# Altium PCB 2020-04-02-04-30101 - PCB1.PcbDoc
Units mm, origin at the board's own origin, x right, y up, seen from the top; angles counter-clockwise.
Board outline 95 x 50 mm, 2 copper layers (Top Layer, Bottom Layer); 4 components, 10 nets, 25 pads, 0 vias.
Unrouted connection lines stored in the file: 10.
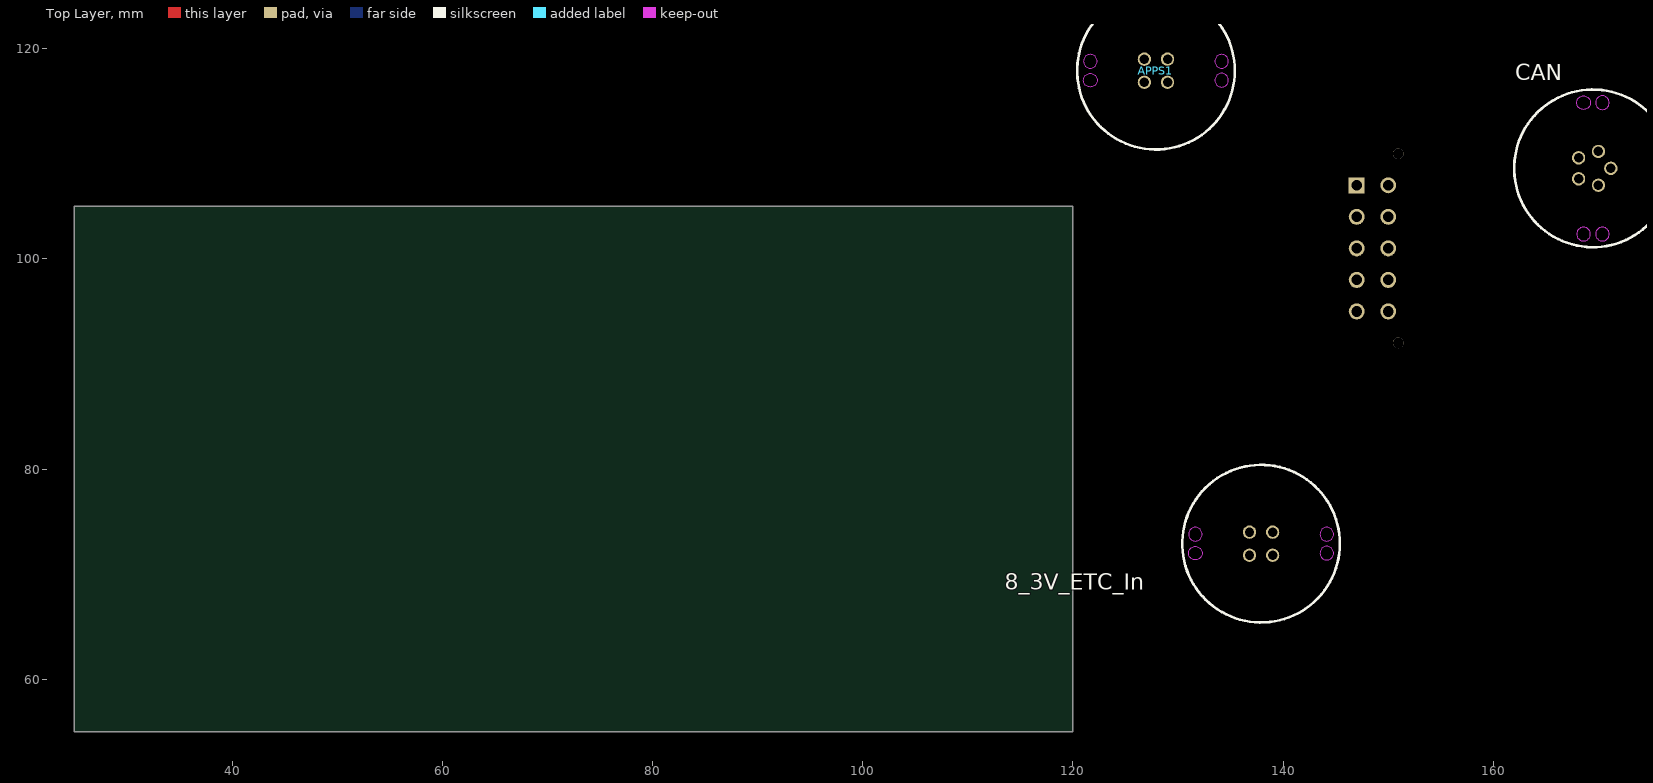
[diagram p0: Top Layer view]
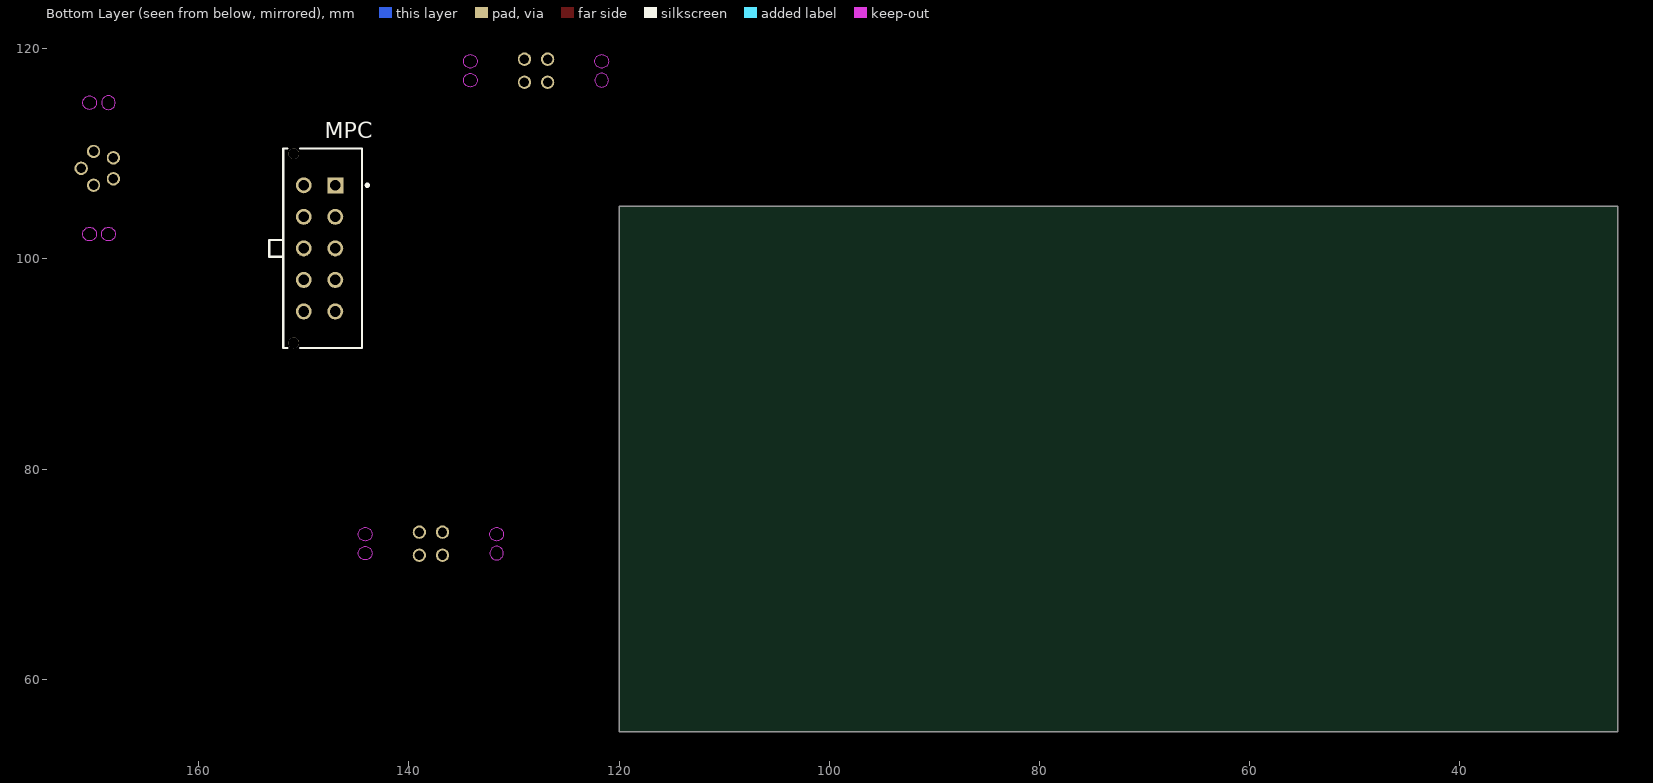
[diagram p1: Bottom Layer view, seen from below]

## Layer stack, top to bottom
Top Solder: solder mask 0.0102, Solder Resist, Dk 3.5
Top Layer: signal copper 0.0356
Dielectric 1: dielectric 0.32, FR-4, Dk 4.8
Bottom Layer: signal copper 0.0356
Bottom Solder: solder mask 0.0102, Solder Resist, Dk 3.5

## Board outline
25,55 120,55 120,105 25,105

## Design rules (kind name [scope] priority, off if disabled: settings)
Clearance [All] p1: gap=0.254 ignorepadtopadclearanceinfootprint=FALSE except(0: Arc-Hole Track-Hole SMDPad-Hole THPad-Hole Via-Hole Fill-Hole Poly-Hole Region-Hole Text-Hole)
PolygonConnect [All] p1: connectstyle=Relief reliefconductorwidth=0.254 reliefentries=4 polygonreliefangle="90 Angle" airgapwidth=0.254
RoutingVias [All] p1: holewidth=0.711 width=1.27 viastyle="Through Hole" minholewidth=0.711 minwidth=1.27 maxholewidth=0.711 maxwidth=1.27
SolderMaskExpansion [All] p1: expansion=0.102
Width [All] p1: maxlimit=1.5 minlimit=0.1 preferedwidth=0.35 minimp=50.000000 maximp=50.000000 favimp=50.000000
30 further rules are at their usual default settings.

## Components (designator, comment, footprint, x,y, rotation, side; value= is the part's Value field where it differs from the comment)
8_3V_ETC_In "Binder_4Pin_Schraub_Female" "09 0412 30 04" 137.9,72.9 r0 top
APPS1 "Binder_4Pin_Schraub_Female" "09 0412 30 04" 127.9,117.9 r0 top
CAN "Binder_5Pin_Schraub_Female" "09 0416 30 05" 169.48,108.61 r270 top
MPC "66201021122" 66201021122 148.2,101 r90 bottom

## Footprints (in the part's own frame and the unit in brackets; to place one, negate y for a bottom-side part, rotate by r counter-clockwise, add the part's x,y. Pads: shape width x height; smd on the part's side, far side on the other; paste and mask are expansions set on the pad)
"09 0412 30 04" [mm] "M9 IP67 Flanschdose, Polzahl: 4, schirmbar, mit Schirmblech, tauchlöten, IP67"
  round 1.27 / inner rect 1.27x2.54 / far side round 1.27 hole 0.9: 1(-1.1,-1.1) 2(-1.1,1.1) 3(1.1,1.1) 4(1.1,-1.1)
  Keep-Out Layer board cut-out: 5.6,-0.9 5.649,-1.149 5.79,-1.36 6.001,-1.501 6.25,-1.55 6.25,-1.55 6.499,-1.501 6.71,-1.36 6.851,-1.149 6.9,-0.9 6.9,-0.9 6.851,-0.651 6.71,-0.44 6.499,-0.299 6.25,-0.25 6.25,-0.25 6.001,-0.299 5.79,-0.44 5.649,-0.651 5.6,-0.9
  Keep-Out Layer board cut-out: 5.6,0.9 5.649,0.651 5.79,0.44 6.001,0.299 6.25,0.25 6.25,0.25 6.499,0.299 6.71,0.44 6.851,0.651 6.9,0.9 6.9,0.9 6.851,1.149 6.71,1.36 6.499,1.501 6.25,1.55 6.25,1.55 6.001,1.501 5.79,1.36 5.649,1.149 5.6,0.9
  Keep-Out Layer board cut-out: -6.25,0.25 -6.001,0.299 -5.79,0.44 -5.649,0.651 -5.6,0.9 -5.6,0.9 -5.649,1.149 -5.79,1.36 -6.001,1.501 -6.25,1.55 -6.25,1.55 -6.499,1.501 -6.71,1.36 -6.851,1.149 -6.9,0.9 -6.9,0.9 -6.851,0.651 -6.71,0.44 -6.499,0.299 -6.25,0.25
  Keep-Out Layer board cut-out: -6.25,-1.55 -6.499,-1.501 -6.71,-1.36 -6.851,-1.149 -6.9,-0.9 -6.9,-0.9 -6.851,-0.651 -6.71,-0.44 -6.499,-0.299 -6.25,-0.25 -6.25,-0.25 -6.001,-0.299 -5.79,-0.44 -5.649,-0.651 -5.6,-0.9 -5.6,-0.9 -5.649,-1.149 -5.79,-1.36 -6.001,-1.501 -6.25,-1.55
  silkscreen extent -7.5,-7.5 7.5,7.5, body extent -7.5,-7.5 7.5,7.5, height 12.65
"09 0416 30 05" [mm] "M9 IP67 Flanschdose, Polzahl: 4, schirmbar, mit Schirmblech, tauchlöten, IP67"
  round 1.27 / inner rect 1.27x2.54 / far side round 1.27 hole 0.9: 1(-1,-1.37) 2(-1.61,0.52) 3(0,1.7) 4(1.61,0.52) 5(1,-1.37)
  Keep-Out Layer board cut-out: -6.25,-1.55 -6.499,-1.501 -6.71,-1.36 -6.851,-1.149 -6.9,-0.9 -6.9,-0.9 -6.851,-0.651 -6.71,-0.44 -6.499,-0.299 -6.25,-0.25 -6.25,-0.25 -6.001,-0.299 -5.79,-0.44 -5.649,-0.651 -5.6,-0.9 -5.6,-0.9 -5.649,-1.149 -5.79,-1.36 -6.001,-1.501 -6.25,-1.55
  Keep-Out Layer board cut-out: -6.25,0.25 -6.001,0.299 -5.79,0.44 -5.649,0.651 -5.6,0.9 -5.6,0.9 -5.649,1.149 -5.79,1.36 -6.001,1.501 -6.25,1.55 -6.25,1.55 -6.499,1.501 -6.71,1.36 -6.851,1.149 -6.9,0.9 -6.9,0.9 -6.851,0.651 -6.71,0.44 -6.499,0.299 -6.25,0.25
  Keep-Out Layer board cut-out: 5.6,0.9 5.649,0.651 5.79,0.44 6.001,0.299 6.25,0.25 6.25,0.25 6.499,0.299 6.71,0.44 6.851,0.651 6.9,0.9 6.9,0.9 6.851,1.149 6.71,1.36 6.499,1.501 6.25,1.55 6.25,1.55 6.001,1.501 5.79,1.36 5.649,1.149 5.6,0.9
  Keep-Out Layer board cut-out: 5.6,-0.9 5.649,-1.149 5.79,-1.36 6.001,-1.501 6.25,-1.55 6.25,-1.55 6.499,-1.501 6.71,-1.36 6.851,-1.149 6.9,-0.9 6.9,-0.9 6.851,-0.651 6.71,-0.44 6.499,-0.299 6.25,-0.25 6.25,-0.25 6.001,-0.299 5.79,-0.44 5.649,-0.651 5.6,-0.9
  silkscreen extent -7.5,-7.5 7.5,7.5, body extent -7.5,-7.5 7.5,7.5, height 12.65
66201021122 [mm] "Dual row Vertical header 10p"
  rect 1.52x1.52 hole 1.02: 1(6,-1.2)
  round 1.52 hole 1.02: 2(3,-1.2) 3(0,-1.2) 4(-3,-1.2) 5(-6,-1.2) 6(6,1.8) 7(3,1.8) 8(0,1.8) 9(-3,1.8) 10(-6,1.8)
  round 1.02 hole 1.02 unplated: MH1(-9,2.74) MH2(9,2.74)
  silkscreen extent -9.5,-4.37 9.5,5.08, body extent -9.35,-3.68 9.35,5.08, height 9.93

## Part data
MPC: "THT Male Header WR-MPC3, Vertical, Dual Row, pitch 3 mm, 10 pins", Contact Resistance="10 mOhm", Operating Temperature="-40 to 105 degC", Working Voltage="250 VAC", ComponentLink1Description=Manufacturer, ComponentLink1URL=http://www.we-online.de, ComponentLink2Description=Datasheet, ComponentLink2URL=https://katalog.we-online.de/em/datasheet/6620xx21122.pdf, Gender=Male, Mounting Technology=THT, Orientation=Vertical, Packaging=Tube, Part Number=66201021122, Pin Number=10, Pitch="3 mm", Published Date="September 2018", Publisher="Wurth Elektronik"

## Nets (pads, with @x,y where several pads share a name; then routed paths per layer and width w, separated by ;. In a path a pad name is that pad's centre, name@x,y a point inside that pad or via, vN(x,y) a via of type N, cw(c..) or ccw(c..) an arc to the next point about the centre after c; other vN are vias at no path point)
Net8_3V_ETC_In_1: 8_3V_ETC_In.1 MPC.10
Net8_3V_ETC_In_2: 8_3V_ETC_In.2 MPC.5
NetAPPS1_1: APPS1.1 MPC.4
NetAPPS1_2: APPS1.2 MPC.3
NetAPPS1_3: APPS1.3 MPC.2
NetAPPS1_4: APPS1.4 MPC.1
NetCAN_1: CAN.1 MPC.6
NetCAN_2: CAN.2 MPC.7
NetCAN_3: CAN.3 MPC.8
NetCAN_4: CAN.4 MPC.9
pads on no net: 8_3V_ETC_In.3 8_3V_ETC_In.4 CAN.5 MPC.MH1 MPC.MH2